# Altium PCB PCB1.PcbDoc
Units mm, origin at the board's own origin, x right, y up, seen from the top; angles counter-clockwise.
Board outline 126.87 x 100.71 mm, 2 copper layers (Top Layer, Bottom Layer); 31 components, 31 nets, 142 pads, 10 vias.
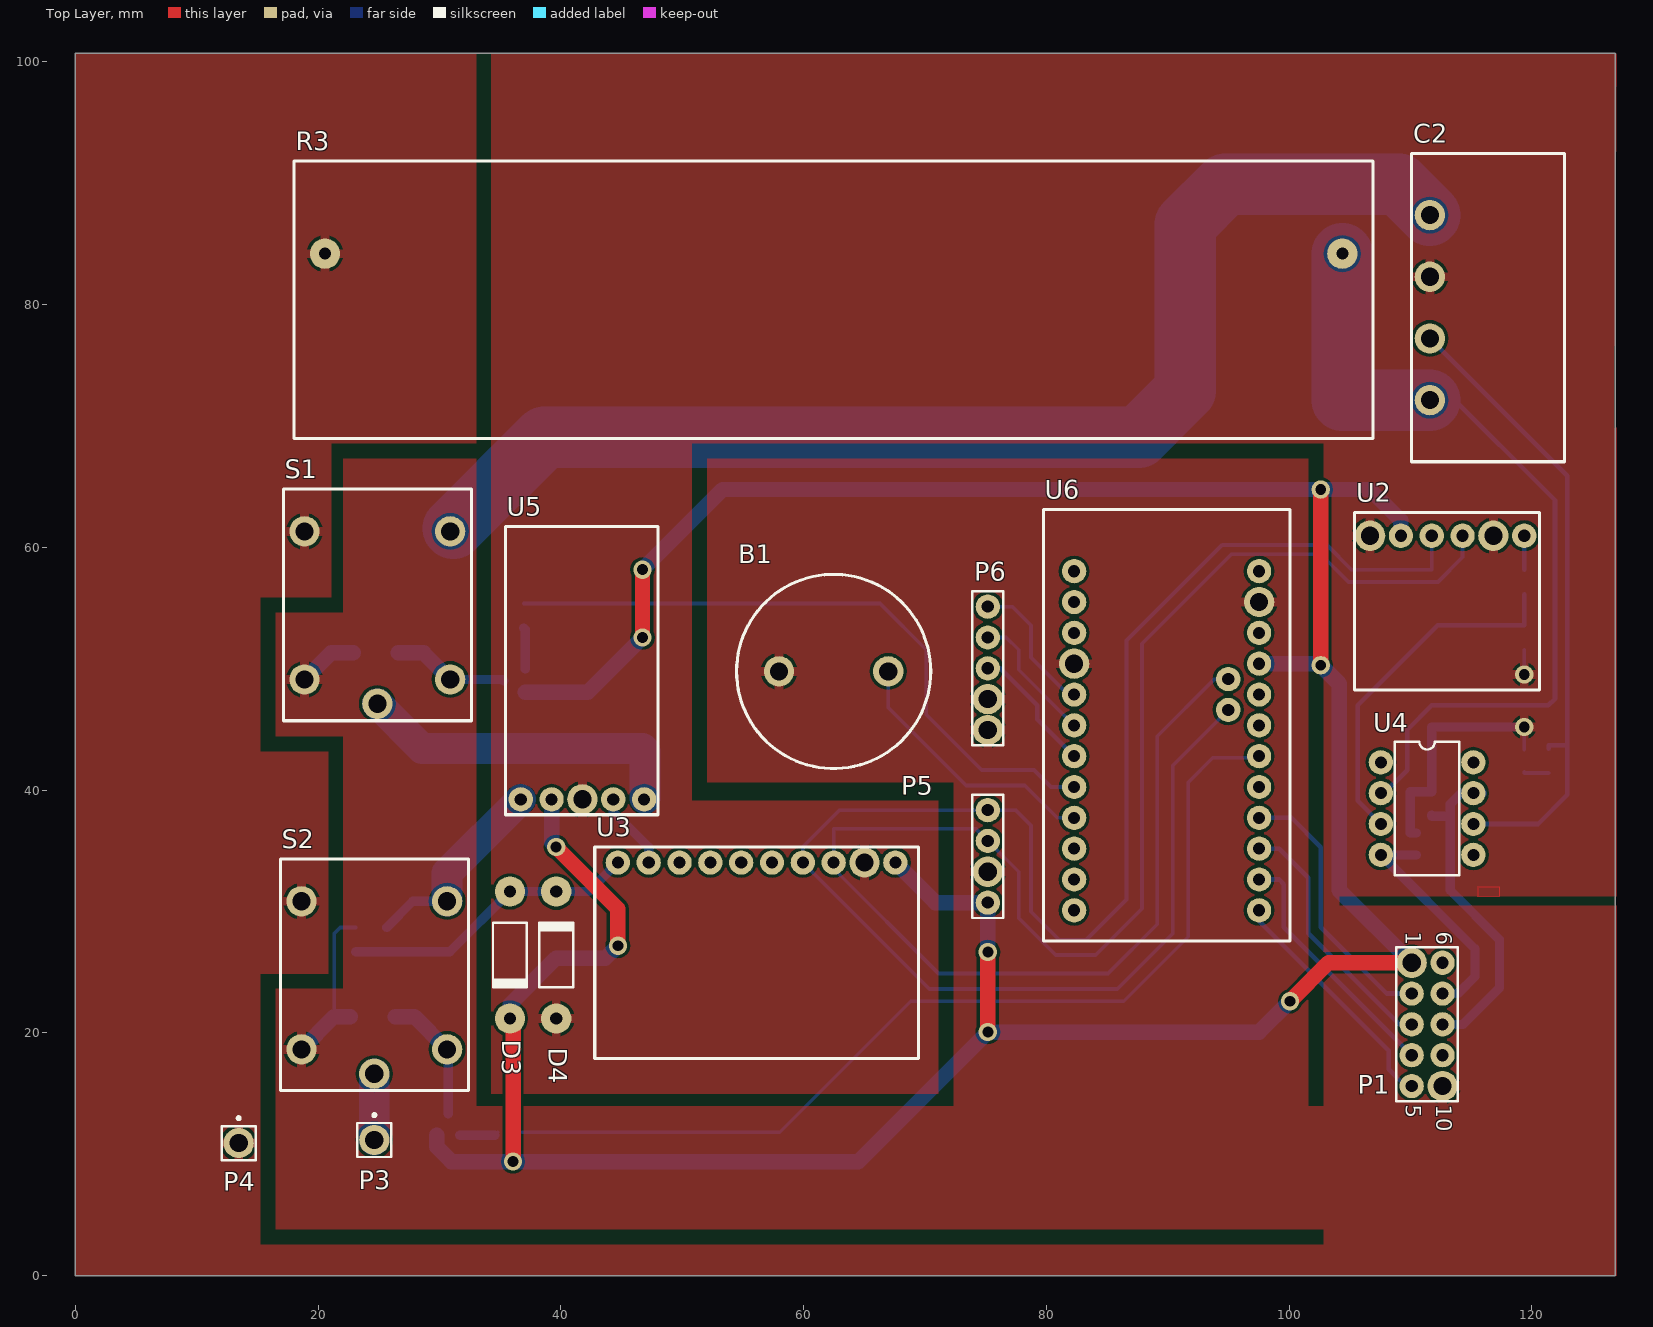
[diagram p0: Top Layer view]
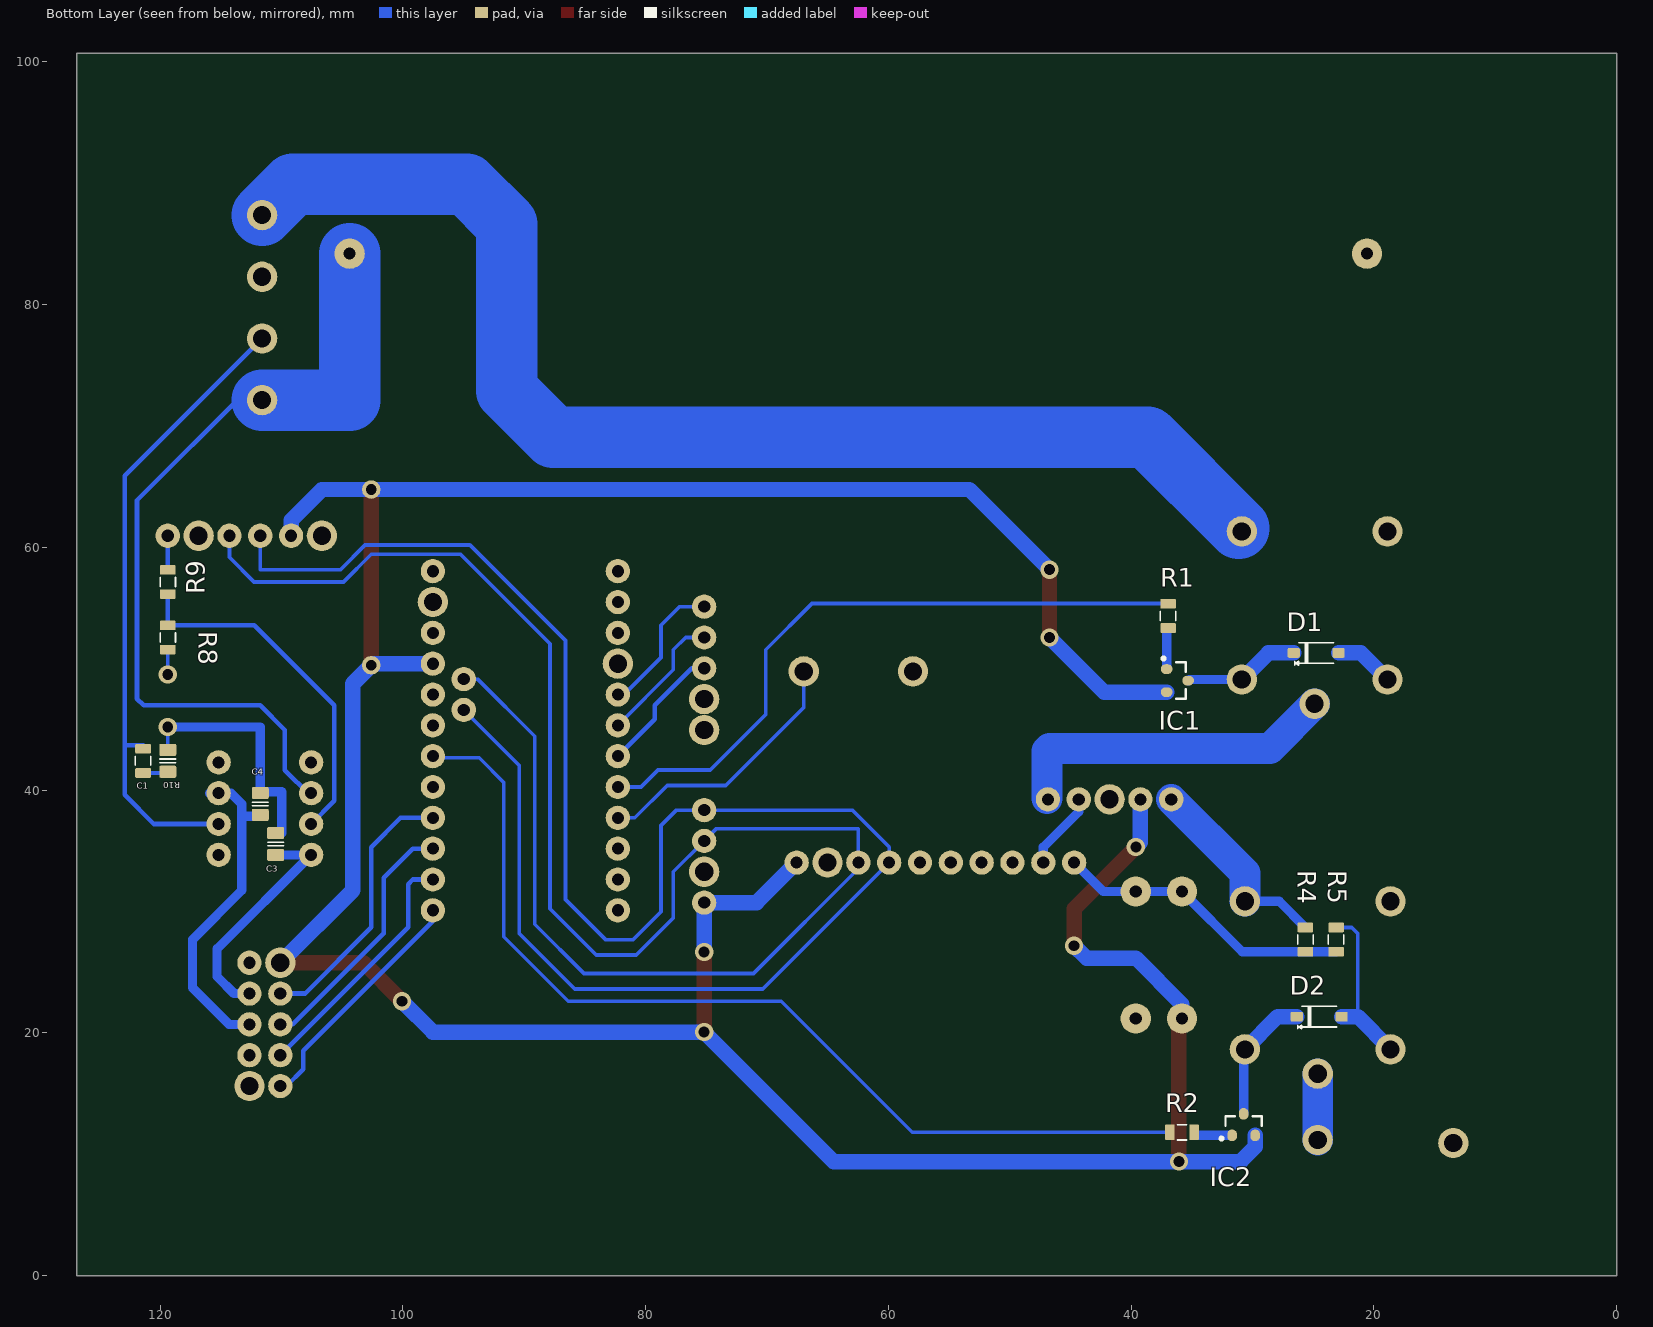
[diagram p1: Bottom Layer view, seen from below]
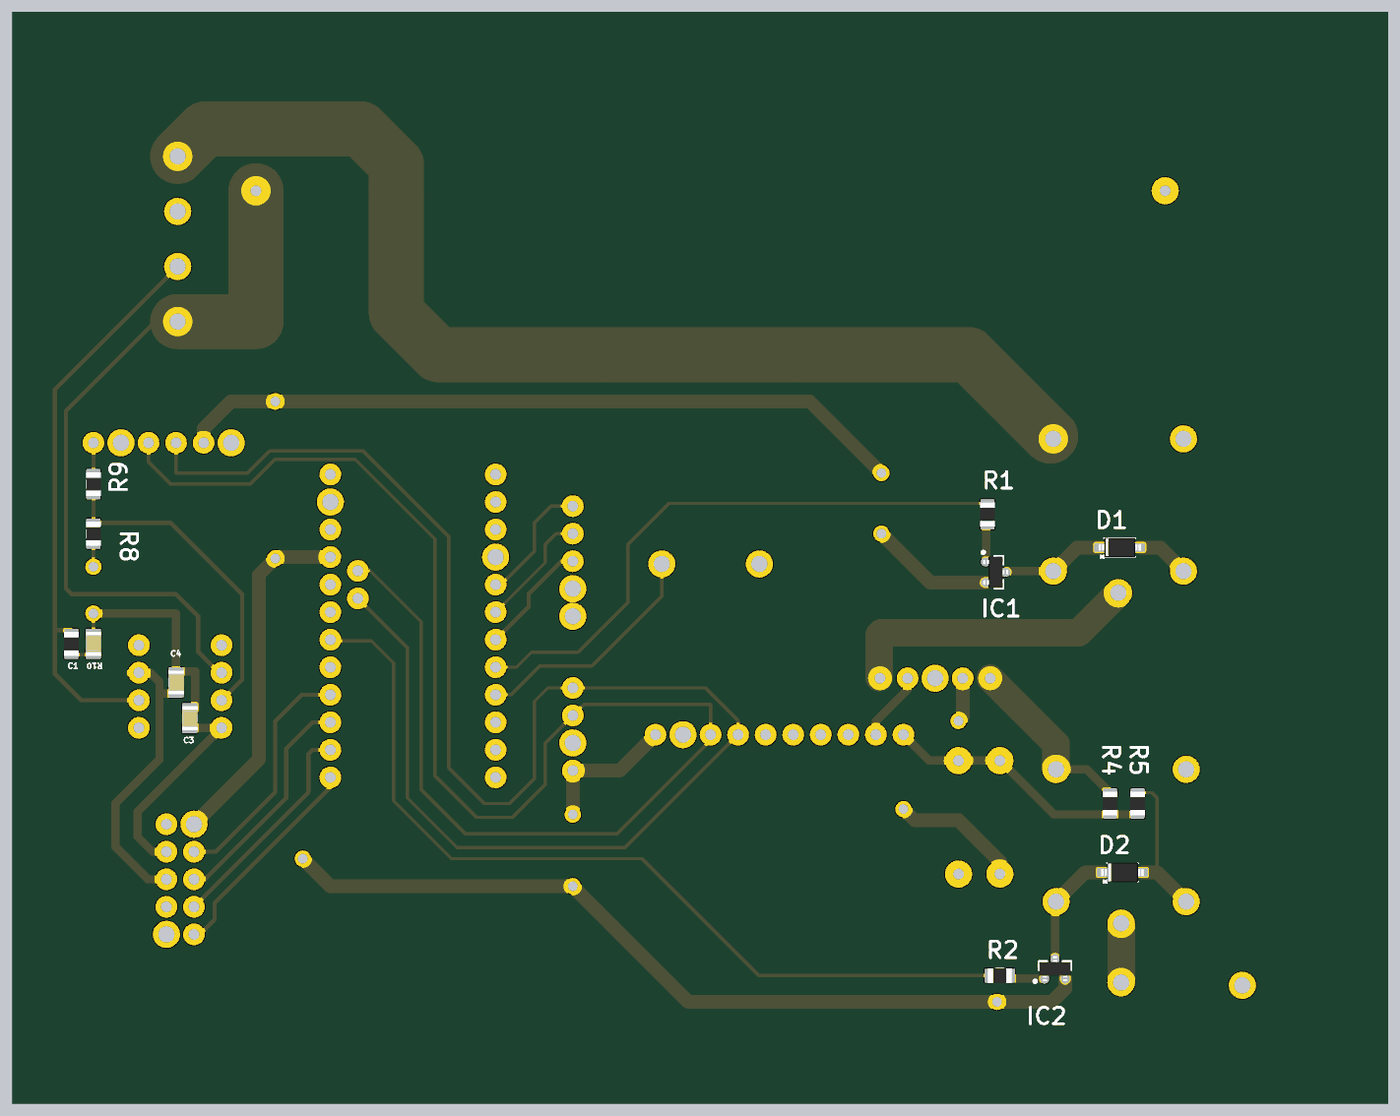
[diagram p2: 3D render of the assembled board from below, using the file's embedded part models]

## Layer stack, top to bottom
Top Solder: solder mask 0.0102, Solder Resist, Dk 3.5
Top Layer: signal copper 0.0356
Dielectric 1: dielectric 0.32, FR-4, Dk 4.8
Bottom Layer: signal copper 0.0356
Bottom Solder: solder mask 0.0102, Solder Resist, Dk 3.5

## Board outline
0,0 126.873,0 126.873,100.711 0,100.711

## Design rules (kind name [scope] priority, off if disabled: settings)
Clearance [All] p1: gap=0.254
PlaneConnect [All] p1: planeconnectstyle=Relief reliefexpansion=0.508 reliefentries=4 reliefconductorwidth=0.762 reliefairgap=0.254
PolygonConnect [All] p1: connectstyle=Relief reliefconductorwidth=0.762 reliefentries=4 polygonreliefangle="90 Angle" airgapwidth=0.254
RoutingVias [All] p1: holewidth=0.9 width=1.5 viastyle="Through Hole" minholewidth=0.9 minwidth=1.5 maxholewidth=0.9 maxwidth=1.5
SolderMaskExpansion [All] p1: expansion=0.102
Width [All] p1: maxlimit=5.08 minlimit=0.305 preferedwidth=0.508
29 further rules are at their usual default settings.

## Components (designator, comment, footprint, x,y, rotation, side; value= is the part's Value field where it differs from the comment)
B1 "pizo_buzzer" pizo_buzzer 62.484,49.784 r90 top
C1 "approved sub OK" CAPC2012X135N 119.38,42.418 r90 bottom
C2 "4_pin_l_molex" 4_pin_l_molex 110.109,92.456 r270 top
C3 "approved sub OK" CAPC2012X135N 110.49,35.56 r90 bottom
C4 "approved sub OK" CAPC2012X135N 111.76,38.862 r90 bottom
D1 "DIODE_SCHOTTKY_40V_1A" SOD123 24.765,51.308 r180 bottom
D2 "DIODE_SCHOTTKY_40V_1A" SOD123 24.511,21.336 r180 bottom
D3 "Diode 1N4001" DO-41 35.814,26.416 r270 top
D4 "Diode 1N4001" DO-41 39.624,26.416 r90 top
IC1 "IRLML6402TRPBF" "INFINEON SOT-23-3" 36.195,49.022 r180 bottom
IC2 "IRLML6402TRPBF" "INFINEON SOT-23-3" 30.734,12.446 r90 bottom
P1 "Header 5X2A" HDR2X5_CEN 110.109,25.781 r270 top
P3 "Plug" PIN1 24.638,11.176 r0 top
P4 "Plug" PIN1 13.462,10.922 r0 top
P5 "Display" HDR1X4 75.184,30.734 r90 top
P6 "Encoder" HDR1X5 75.184,44.958 r90 top
R1 "Thick Film" RESC2012X70N 36.957,54.356 r90 bottom
R2 "Thick Film" RESC2012X70N 35.814,11.811 r0 bottom
R3 "1R" 100w_1ohm_power_resistor 18.034,68.961 r0 top
R4 "Thick Film" RESC2012X70N 25.654,27.686 r270 bottom
R5 "Thick Film" RESC2012X70N 23.114,27.686 r270 bottom
R8 "Thick Film" RESC2012X70N 119.38,57.15 r270 bottom
R9 "Thick Film" RESC2012X70N 119.38,52.578 r90 bottom
R10 "Thick Film" RESC2012X70N 121.412,42.418 r90 bottom
S1 "chinese_relay" chinese_relay 32.639,45.72 r90 top
S2 "chinese_relay" chinese_relay 32.385,15.24 r90 top
U2 "mcp4725" mcp4725 121.92,63.5 r180 top
U3 "ads1x15" ads1x15 70.104,35.941 r180 top
U4 "LF351P" P008 111.379,38.481 r270 top
U5 "cs-4173" cs-4173 35.179,37.846 r0 top
U6 "arduino_pro_mini" arduino_pro_mini 79.502,27.432 r0 top

## Footprints (in the part's own frame and the unit in brackets; to place one, negate y for a bottom-side part, rotate by r counter-clockwise, add the part's x,y. Pads: shape width x height; smd on the part's side, far side on the other; paste and mask are expansions set on the pad)
4_pin_l_molex [mm]
  round 2.5 hole 1.5: 0(5.08,1.5) 1(10.16,1.5) 2(15.24,1.5) 3(20.32,1.5)
  silkscreen extent 0,0 25.4,12.6
100w_1ohm_power_resistor [mm]
  round 2.5 hole 1: 1(2.54,15.24) 2(86.36,15.24)
  silkscreen extent 0,0 88.9,22.86
ads1x15 [mm]
  round 2 hole 1: A0(17.78,1.905) A1(20.32,1.905) A2(22.86,1.905) A3(25.4,1.905) ADDR(12.7,1.905) ALRT(15.24,1.905) SCL(7.62,1.905) SDA(10.16,1.905) VDD(2.54,1.905)
  round 2.5 hole 1.5: GND(5.08,1.905)
  silkscreen extent 0.63,0.64 27.3,18.03
arduino_pro_mini [mm]
  round 2 hole 1: 2(2.794,20.447) 3(2.794,17.907) 4(2.794,15.367) 5(2.794,12.827) 6(2.794,10.287) 7(2.794,7.747) 8(2.794,5.207) 9(2.794,2.667) 10(18.034,2.667) 11(18.034,5.207) 12(18.034,7.747) 13(18.034,10.287) 27(15.494,21.717) 28(15.494,19.177) A0(18.034,12.827) A1(18.034,15.367) A2(18.034,17.907) A3(18.034,20.447) RAW(18.034,30.607) RST1(2.794,25.527) RST2(18.034,25.527) RXT(2.794,28.067) TXO(2.794,30.607) VCC(18.034,22.987)
  round 2.5 hole 1.5: GND1(2.794,22.987) GND2(18.034,28.067)
  silkscreen extent 0.25,0.13 20.57,35.69
CAPC2012X135N [mm] "Chip Capacitor, Body 2.0x1.2mm, EIA 0805, IPC Medium Density"
  round 0.254 on Mech15: 0(0,0)
  rrect25% 1x1.4 smd: 1(-0.9,0) 2(0.9,0)
  Top Layer pour cut-out: -0.675,0.7 -0.475,0.9 0.475,0.9 0.675,0.7 0.675,-0.7 0.475,-0.9 -0.475,-0.9 -0.675,-0.7
  silkscreen extent -0.15,-0.65 0.15,0.65, body extent -1.1,-0.72 1.1,0.73, height 1.34
chinese_relay [mm]
  round 2.5 hole 1.5: GND(3.4,13.75) IN(1.4,7.75) NC(15.6,13.75) NO(15.6,1.75) VCC(3.4,1.75)
  silkscreen extent 0,0 19.1,15.49
cs-4173 [mm]
  round 2.5 hole 1.5: GND(6.604,1.397)
  round 2 hole 1: IN(1.524,1.397) OUT(11.684,1.397) VCC(4.064,1.397) VSE(9.144,1.397)
  silkscreen extent 0.25,0.13 12.83,23.88
DO-41 [mm] "Diode, Axial; Body 5.2 x 2.7 mm (LxDia. max), Lead Dia. 0.86 mm (max)"
  round 2.5 hole 1: 1(-5.23,0) 2(5.23,0)
  silkscreen extent -2.65,-1.4 2.75,1.4
HDR1X4 [mm] "Connector; Header; 4 Position"
  round 2 hole 1: 1(0,0) 3(5.08,0) 4(7.62,0)
  round 2.5 hole 1.5: 2(2.54,0)
  silkscreen extent -1.27,-1.27 8.89,1.27
HDR1X5 [mm] "Connector; Header; 5 Position"
  round 2.5 hole 1.5: 1(0,0) 2(2.54,0)
  round 2 hole 1: 3(5.08,0) 4(7.62,0) 5(10.16,0)
  silkscreen extent -1.27,-1.27 11.43,1.27
HDR2X5_CEN [mm] "Connector; Header; 5x2 Position"
  round 2.5 hole 1.5: 1(0,0) 10(10.16,2.54)
  round 2 hole 1: 2(2.54,0) 3(5.08,0) 4(7.62,0) 5(10.16,0) 6(0,2.54) 7(2.54,2.54) 8(5.08,2.54) 9(7.62,2.54)
  silkscreen extent -1.27,-1.27 11.43,3.81
"INFINEON SOT-23-3" [mm] "SOT23, 3-Leads, Body 2.90x2.40mm, Pitch 0.95mm, IPC Medium Density"
  oval 0.972x0.802 smd: 1(-0.885,0.95) 2(0.885,0) 3(-0.885,-0.95)
  silkscreen extent -1.28,-1.5 0.7,1.95, body extent -1.16,-1.45 1.16,1.45, height 1
mcp4725 [mm]
  round 2.5 hole 1.5: AGND(5.08,2.54) GND(15.24,2.54)
  round 2 hole 1: SCL(7.62,2.54) SDA(10.16,2.54) VDD(12.7,2.54) VOUT(2.54,2.54)
  silkscreen extent 1.27,0.64 16.51,15.24
P008 [mm] "DIP; 8 Leads; Row Spacing 7.62 mm; Pitch 2.54 mm"
  round 2 hole 1: 1(-3.81,-3.81) 2(-1.27,-3.81) 3(1.27,-3.81) 4(3.81,-3.81) 5(3.81,3.81) 6(1.27,3.81) 7(-1.27,3.81) 8(-3.81,3.81)
  silkscreen extent -5.5,-2.65 5.5,2.65
PIN1 [mm] "Connector; Plug"
  round 2.5 hole 1.5: 1(0,0)
  silkscreen extent -1.4,-1.4 1.4,2.17
pizo_buzzer [mm]
  round 2.5 hole 1.5: 0(0,4.5) 1(0,-4.5)
  silkscreen extent -8,-8 8,8
RESC2012X70N [mm] "Chip Resistor, Body 2.0x1.2mm, EIA 0805, IPC Medium Density"
  round 0.254 on Mech15: 0(0,0)
  rrect25% 0.8x1.3 smd: 1(-1,0) 2(1,0)
  Top Layer pour cut-out: -0.725,0.65 -0.525,0.85 0.525,0.85 0.725,0.65 0.725,-0.65 0.525,-0.85 -0.525,-0.85 -0.725,-0.65
  silkscreen extent -0.38,-0.64 0.38,0.64, body extent -1.1,-0.67 1.1,0.68, height 0.69
SOD123 [mm] "SOD-123; 2 Leads; Body 2.7 x 1.6 mm, (LxW)"
  round 0.508 on Mech15: 0(0,0)
  rrect25% 1x0.8 smd: A(1.85,0) K(-1.85,0)
  silkscreen extent -1.75,-1 1.45,0.85, body extent -1.95,-0.9 1.95,0.9, height 1.18

## Part data
C1 C3 C4: library part CAPC_1n8_50V_0805, "Capacitor SMD Cer 1.8nF 10% 50V X7R 0805"
D1 D2: "Diode Schottky SMD 40V 1A SOD123"
D3 D4: "1 Amp General Purpose Rectifier"
IC1 IC2: "MOSFET P-CH 20V 3.7A SOT-23"
P1: "Header, 5-Pin, Dual row"
P5: library part "Header 4", "Header, 4-Pin"
P6: library part "Header 5", "Header, 5-Pin"
R1 R2 R4 R5 R8 R9 R10: library part RES_1K3_0805_1%, "Resistor SMD chip 1.3k Ohm 0.125W 1% 0805"
R3: library part 1ohm_100w_power_resistor
U4: "Operational Amplifier"

## Free pads (board coordinates)
  round 1.524 hole 0.9: 2(102.616,50.292) 3(102.616,64.77)

## Via types
v1: diameter 1.5, hole 0.9, Top Layer to Bottom Layer, 10 vias

## Nets (pads, with @x,y where several pads share a name; then routed paths per layer and width w, separated by ;. In a path a pad name is that pad's centre, name@x,y a point inside that pad or via, vN(x,y) a via of type N, cw(c..) or ccw(c..) an arc to the next point about the centre after c; other vN are vias at no path point)
GND: B1.0 C1.2 C2.1 C3.2 C4.2 D1.A D2.A D4.1 P1.10 P4.1 P5.2 P6.1 P6.2 R3.1 R5.1 R9.1 S1.GND S1.NC S2.GND S2.NC U2.AGND U2.GND U3.GND U5.GND U6.GND1 U6.GND2 | length 41.5
  Bottom Layer w0.305: 21.331,21.336 21.331,28.189 21.828,28.686 R5.1 ; C1.2 v1(119.38,45.212) ; v1(119.38,49.53) R9.1
  Bottom Layer w0.762: C3.2 109.982,36.46 109.982,39.878 111.76,39.878 111.76,45.212 v1(119.38,45.212)
  Bottom Layer w1.27: S2.GND 21.331,21.336 D2.A ; S1.GND 21.077,51.308 D1.A
MISO: P1.3 U6.12 | length 21.2
  Bottom Layer w0.381: U6.12 99.187,35.179 101.6,32.766 101.6,28.194 109.093,20.701 P1.3
MOSI: P1.4 U6.11 | length 20.7
  Bottom Layer w0.381: U6.11 99.187,32.639 99.568,32.258 99.568,28.702 P1.4
NetB1_1: B1.1 U6.6 | length 22.1
  Bottom Layer w0.305: B1.1 66.984,46.808 73.406,40.386 78.232,40.386 80.899,37.719 U6.6
NetC1_1: C1.1 R10.1 | length 2.1
  Bottom Layer w0.305: C1.1 119.38,41.418 R10.1
NetC2_0: C2.0 S1.NO | length 101.3
  Bottom Layer w5.08: S1.NO@31.14,61.57 38.657,69.088 87.63,69.088 91.44,72.898 91.44,86.614 94.742,89.916 109.069,89.916 C2.0
NetC2_2: C2.2 R10.2 U4.6 | length 52.8
  Bottom Layer w0.381: C2.2 122.936,65.889 122.936,43.688 ; U4.6 120.523,37.211 122.936,39.624 122.936,43.688 ; R10.2 121.412,43.688 122.936,43.688
NetC2_3: C2.3 R3.2 U4.2 | length 67.8
  Bottom Layer w0.381: U4.2@107.696,39.624 109.728,41.656 109.728,44.958 111.76,46.99 121.367,46.99 121.92,47.543 121.92,63.862 112.884,72.898
  Bottom Layer w5.08: R3.2 104.394,72.136 C2.3
NetD1_K: D1.K IC1.2 S1.VCC | length 9.6
  Bottom Layer w0.762: S1.VCC 35.212,49.12 IC1.2
  Bottom Layer w1.27: D1.K 28.701,51.308 S1.VCC
NetD2_K: D2.K IC2.2 S2.VCC | length 10.6
  Bottom Layer w0.762: IC2.2 S2.VCC@30.734,18.541
  Bottom Layer w1.27: D2.K 27.939,21.336 S2.VCC
NetD3_1: D3.1 D4.2 R4.2 R5.2 U3.A3 | length 24.6
  Bottom Layer w0.762: R5.2 R4.2 30.854,26.686 D3.1 D4.2 42.314,31.646 U3.A3
NetIC1_1: IC1.1 R1.1 | length 3.4
  Bottom Layer w0.762: R1.1 37.08,53.233 IC1.1
NetIC2_1: IC2.1 R2.1 | length 3.2
  Bottom Layer w0.305: R2.1@34.564,11.561 R2.1
  Bottom Layer w0.762: IC2.1 R2.1@34.564,11.561
NetP3_1: P3.1 S2.IN | length 5.5
  Bottom Layer w2.54: S2.IN 24.635,11.179 P3.1
NetP5_3: P5.3 U2.SCL U3.SCL U6.27 | length 148
  Bottom Layer w0.305: U6.27 93.853,49.149 89.154,44.45 89.154,28.956 85.09,24.892 71.12,24.892 62.484,33.528 U3.SCL 63.246,34.036 62.484,34.798 62.484,36.83 74.168,36.83 P5.3 77.724,33.274 77.724,29.464 80.772,26.416 84.074,26.416 87.884,30.226 87.884,52.07 95.259,59.445 102.607,59.445 104.902,57.15 112.268,57.15 114.3,59.182 U2.SCL
NetP5_4: P5.4 U2.SDA U3.SDA U6.28 | length 148.9
  Bottom Layer w0.305: P5.4@74.422,38.354 62.992,38.354 59.944,35.306 U3.SDA 70.358,23.622 85.852,23.622 90.424,28.194 90.424,42.037 U6.28 ; P5.4 77.47,38.354 78.74,37.084 78.74,29.972 81.026,27.686 83.312,27.686 86.614,30.988 86.614,52.324 94.488,60.198 103.124,60.198 105.156,58.166 111.76,58.166 U2.SDA@111.76,60.452 ; U2.SDA@111.134,60.96 U2.SDA
NetP6_3: P6.3 U6.4 | length 10.8
  Bottom Layer w0.381: P6.3 76.2,50.038 79.248,46.99 79.248,45.847 U6.4
NetP6_4: P6.4 U6.3 | length 11.1
  Bottom Layer w0.305: P6.4 76.708,52.578 77.724,51.562 77.724,49.911 U6.3
NetP6_5: P6.5 U6.2 | length 11.2
  Bottom Layer w0.305: P6.5 77.216,55.118 78.74,53.594 78.74,50.936 U6.2@81.797,47.879
NetR1_2: R1.2 U6.5 | length 55.1
  Bottom Layer w0.305: R1.2 36.973,55.372 66.294,55.372 70.104,51.562 70.104,46.228 74.676,41.656 78.994,41.656 80.391,40.259 U6.5 U6.5@82.296,40.64
NetR2_2: R2.2 U6.A1 | length 81
  Bottom Layer w0.305: R2.2 58.039,11.811 68.834,22.606 86.388,22.606 91.694,27.912 91.694,40.64 93.726,42.672 U6.A1@97.536,42.672
NetR4_1: R4.1 S2.NO U5.IN | length 16.8
  Bottom Layer w0.762: R4.1 27.808,30.84 S2.NO
  Bottom Layer w2.54: S2.NO 30.635,33.175 U5.IN
NetR8_1: R8.1 U2.VOUT | length 2.8
  Bottom Layer w0.381: R8.1 U2.VOUT
NetR8_2: R8.2 R9.2 U4.3 | length 29.8
  Bottom Layer w0.381: U4.3@107.696,37.338 U4.3 105.664,39.116 105.664,46.99 112.252,53.578 R9.2 R8.2
NetS1_IN: S1.IN U5.OUT | length 27.6
  Bottom Layer w2.54: S1.IN 28.575,43.434 46.736,43.434 46.94,43.23 U5.OUT@46.94,39.32
NetU3_A2: U3.A2 U5.VSE | length 6.4
  Bottom Layer w0.762: U5.VSE 44.323,38.227 47.244,35.306 U3.A2
SCK: P1.2 U6.13 | length 22.4
  Bottom Layer w0.381: U6.13 100.203,37.719 102.616,35.306 102.616,28.702 108.077,23.241 P1.2
SS: P1.5 U6.10 | length 20.5
  Bottom Layer w0.381: U6.10 97.536,29.21 108.204,18.542 108.204,17.018 109.601,15.621 P1.5 P1.5@110.109,16.129
"VCC +5V": D3.2 IC1.3 IC2.3 P1.1 P5.1 pad.2 pad.3 U2.VDD U3.VDD U5.VCC U6.VCC | length 278.4
  Top Layer w1.27: D3.2 36.068,20.932 v1(36.068,9.398) ; v1(39.624,35.306) 44.704,30.226 v1(44.704,27.178) ; v1(46.736,52.578) v1(46.736,58.166) ; v1(75.184,20.066) v1(75.184,26.67) ; v1(100.076,22.606) 103.251,25.781 P1.1 ; pad.2 pad.3
  Bottom Layer w1.27: IC2.3 29.784,10.602 30.988,9.398 v1(36.068,9.398) 64.516,9.398 v1(75.184,20.066) 97.536,20.066 v1(100.076,22.606) ; D3.2 35.814,22.352 39.624,26.162 43.688,26.162 v1(44.704,27.178) ; IC1.3 42.23,48.072 v1(46.736,52.578) ; U5.VCC 39.243,35.687 v1(39.624,35.306) ; v1(46.736,58.166) 53.34,64.77 pad.3 106.68,64.77 109.22,62.23 U2.VDD ; U3.VDD 70.866,30.734 P5.1 v1(75.184,26.67) ; U6.VCC 102.489,50.419 pad.2 104.14,48.768 104.14,31.75 P1.1
"VCC +15V": C4.1 P1.8 U4.7 | length 27.5
  Bottom Layer w0.762: C4.1 111.76,37.846 113.284,37.846 ; P1.8 114.333,20.701 117.348,23.716 117.348,27.686 113.284,31.75 113.284,37.846 ; U4.7@115.951,39.751 U4.7 114.173,39.751 113.284,38.862 113.284,37.846
"VCC -15V": C3.1 P1.7 U4.4 | length 19.4
  Bottom Layer w0.305: U4.4 107.569,34.66 U4.4@107.58,34.66
  Bottom Layer w0.762: C3.1 107.58,34.66 115.316,26.924 115.316,24.638 113.919,23.241 P1.7
pads on no net: C1.0 C3.0 C4.0 D1.0 D2.0 P1.6 P1.9 R1.0 R2.0 R4.0 R5.0 R8.0 R9.0 R10.0 U3.A0 U3.A1 U3.ADDR U3.ALRT U4.1 U4.5 U4.8 U6.7 U6.8 U6.9 U6.A0 U6.A2 U6.A3 U6.RAW U6.RST1 U6.RST2 U6.RXT U6.TXO

## Polygon pours and split planes (outlines as drawn)
GND on Top Layer "GND" (solid, pour order 14): 115.57,31.242 117.348,31.242 117.348,32.004 115.57,32.004
GND on Top Layer "GND" (solid, pour order 16): 127.001,100.711 34.29,100.711 34.29,14.986 71.12,14.986 71.12,39.116 50.8,39.116 50.8,68.58 126.75,68.58
GND on Top Layer "GND" (solid, pour order 18): 102.87,67.337 102.87,31.242 127,31.242 127,67.337
GND on Top Layer "GND" (solid, pour order 20): 52.07,67.31 52.07,40.64 72.39,40.64 72.39,13.97 33.02,13.97 33.02,67.31 22.098,67.31 22.098,3.81 101.6,3.81 101.6,67.31
GND on Top Layer "GND" (solid, pour order 22): 127,66.04 127,69.85 102.87,69.85 102.87,66.04
GND on Top Layer "GND" (solid, pour order 26): 127,30.48 102.87,30.48 102.87,0 127,0
GND on Top Layer "GND" (solid, pour order 28): 102.87,29.21 104.14,29.21 104.14,33.02 102.87,33.02
GND on Top Layer "GND" (solid, pour order 32): 101.6,3.81 104.14,3.81 104.14,13.97 101.6,13.97
GND on Top Layer "GND" (solid, pour order 34): 33.02,100.711 33.02,68.58 15.24,68.58 15.24,0 0,0 0,100.711
GND on Top Layer "GND" (solid, pour order 36): 15.24,0 101.6,0 101.6,2.54 15.24,2.54 15.24,7.874
GND on Top Layer "GND" (solid, pour order 44): 100.33,2.54 104.648,2.54 104.902,2.54 104.902,0 100.33,0
GND on Top Layer "GND" (solid, pour order 50): 15.24,68.58 21.082,68.58 21.082,55.88 15.24,55.88
GND on Top Layer "GND" (solid, pour order 54): 22.098,44.45 16.51,44.45 16.51,54.61 22.098,54.61
GND on Top Layer "GND" (solid, pour order 56): 16.51,23.622 22.098,23.622 22.098,3.81 16.51,3.81
GND on Top Layer "GND" (solid, pour order 58): 15.24,24.892 20.828,24.892 20.828,43.18 15.24,43.18

## Text inside footprints (layer, text, board x,y; h text height)
P1: Top Overlay "1" at 109.601,28.321 h1.27 r270; Top Overlay "5" at 109.601,14.097 h1.27 r270; Top Overlay "10" at 112.141,14.097 h1.27 r270; Top Overlay "6" at 112.141,28.321 h1.27 r270